# Altium PCB GBA_DMG.pcbdoc
Units mil, origin at the board's own origin, x right, y up, seen from the top; angles counter-clockwise.
Board outline 5005.59 x 4149.45 mil, 2 copper layers (Top Layer, Bottom Layer); 51 components, 69 nets, 162 pads, 18 vias.
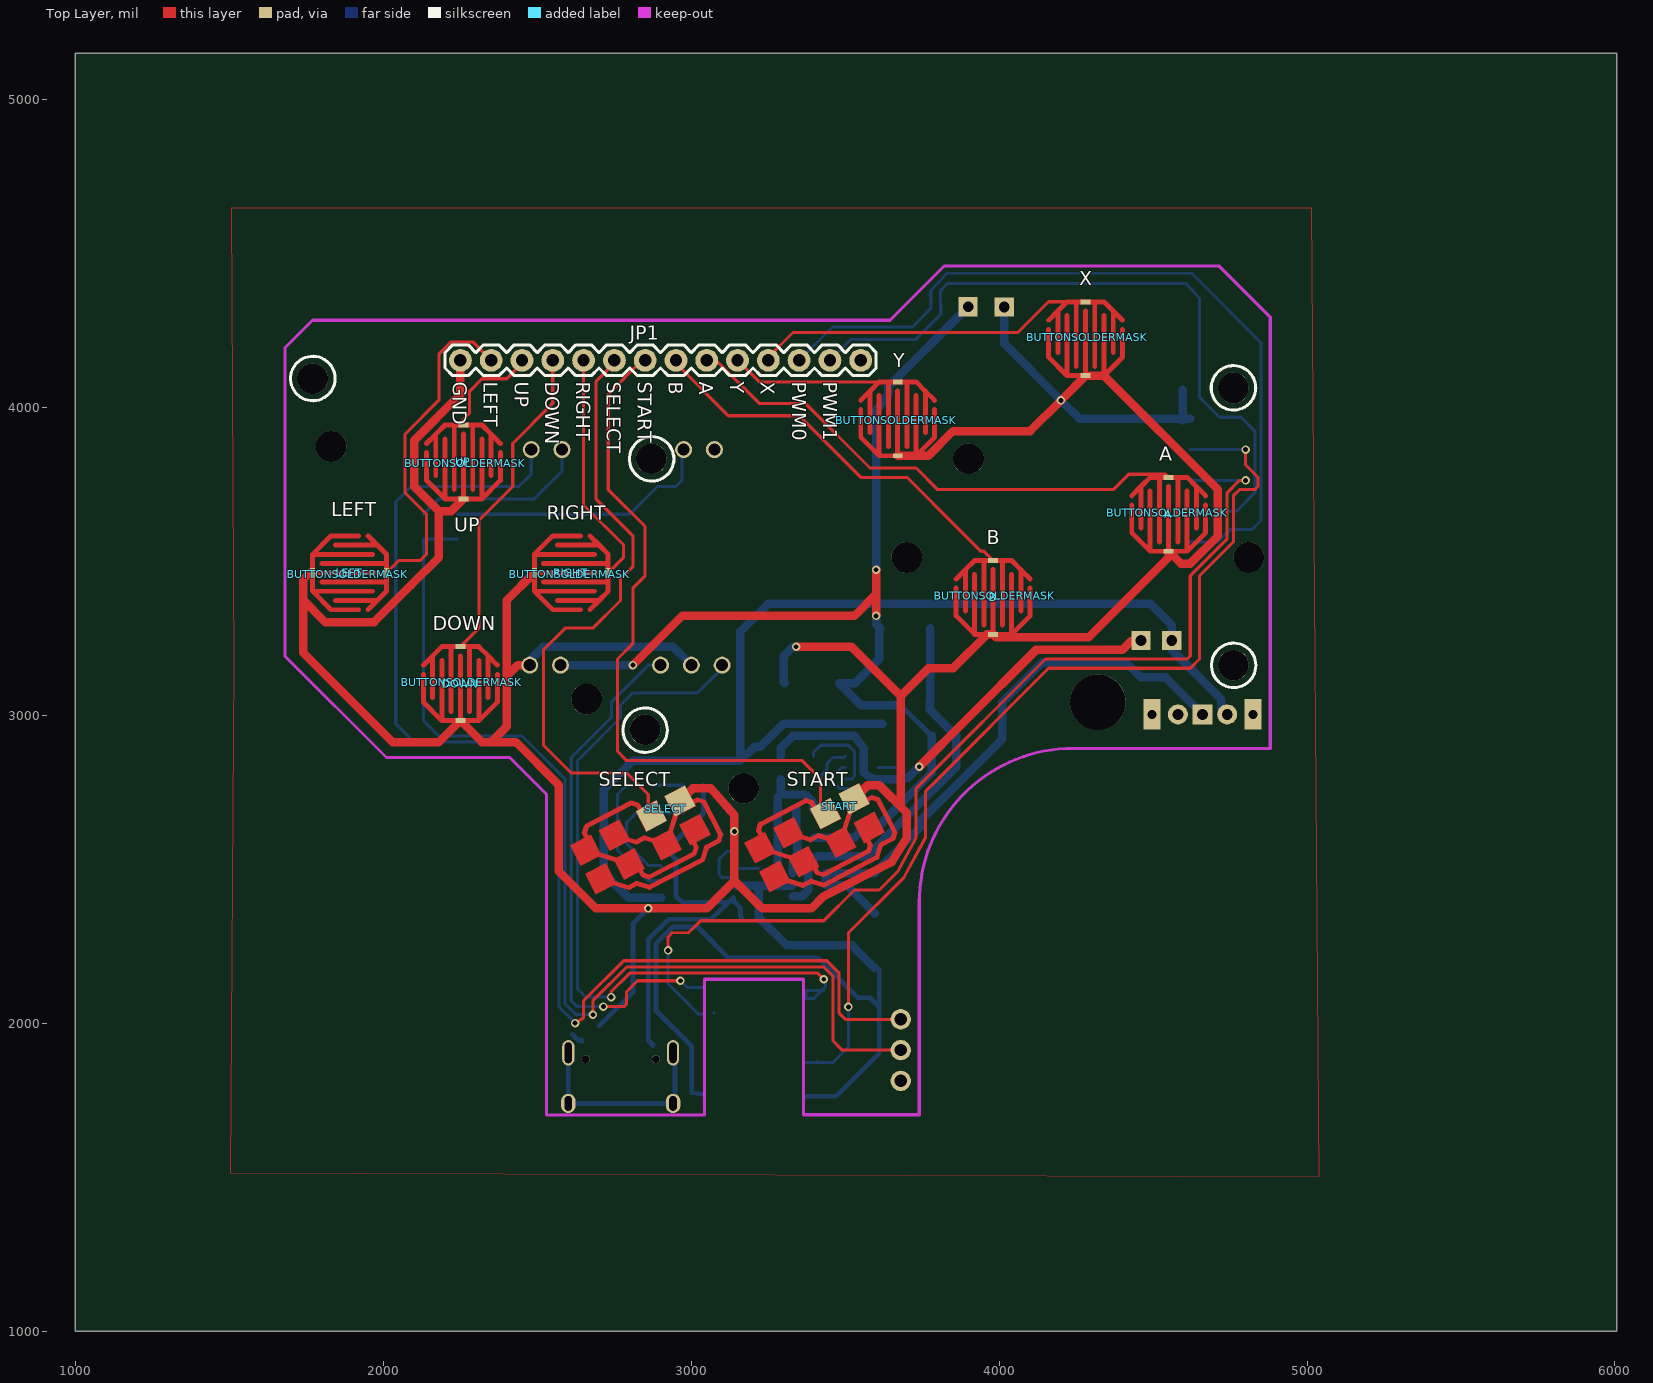
[diagram p0: Top Layer view]
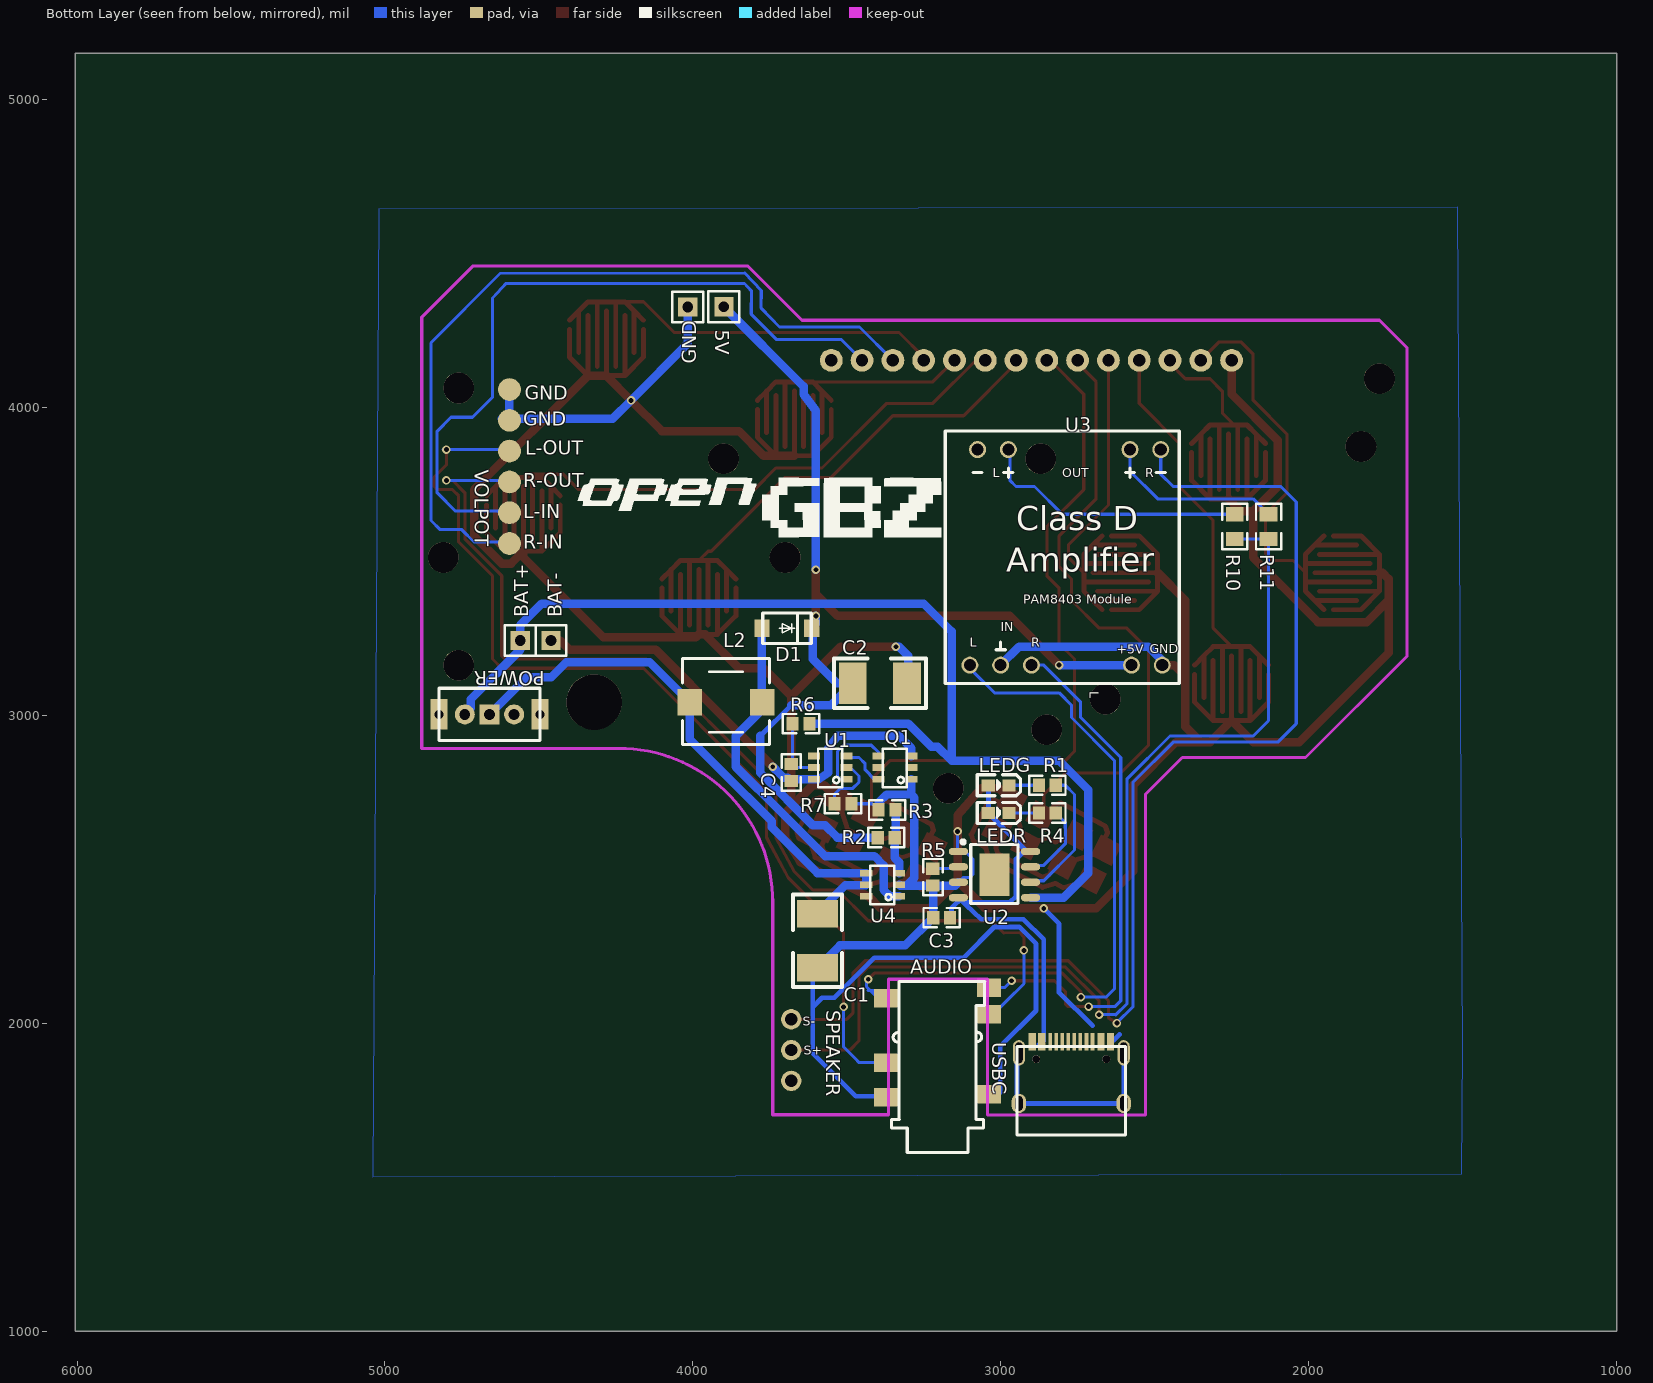
[diagram p1: Bottom Layer view, seen from below]

## Layer stack, top to bottom
Top Layer: signal copper (thickness not stored)
Dielectric: dielectric 12.6, FR-4, Dk 4.8
Bottom Layer: signal copper (thickness not stored)

## Board outline
6005.59,1000 1000,1000 1000,5149.45 6005.59,5149.45

## Components (designator, comment, footprint, x,y, rotation, side; value= is the part's Value field where it differs from the comment)
5V "5V" HDR-1X1/2.54 3899.61,4326.46 r0 bottom
A "DMG-BTN" DMG-BTN 4550.61,3532.46 r0 top
AUDIO "PJ-399E-6A" PJ-399E-6A 3205.61,1658.89 r90 bottom
B "DMG-BTN" DMG-BTN 3980.61,3262.46 r0 top
BAT+ "BAT+" HDR-1X1/2.54 4560.61,3242.46 r0 bottom
BAT- "BAT-" HDR-1X1/2.54 4460.61,3242.46 r0 bottom
BUTTONSOLDERMASK "_" ? 2255.59,3107.44 r0 top
BUTTONSOLDERMASK "_" ? 2605.59,3457.44 r0 top
BUTTONSOLDERMASK "_" ? 2265.59,3817.44 r0 top
BUTTONSOLDERMASK "_" ? 3985.59,3387.44 r0 top
BUTTONSOLDERMASK "_" ? 1885.59,3457.44 r0 top
BUTTONSOLDERMASK "_" ? 3665.59,3957.44 r0 top
BUTTONSOLDERMASK "_" ? 4285.59,4227.44 r0 top
BUTTONSOLDERMASK "_" ? 4545.59,3657.44 r0 top
C1 "22uF" 1812 3595.61,2267.46 r270 bottom
C2 "22uF" 1812 3392.46,3103.57 r0 bottom
C3 "10u" 0603 3160.61,2342.46 r180 bottom
C4 "0.1u" 0603 3680.61,2782.46 r270 bottom
D1 "SS34" SMA(DO-214AC) 3690.61,3282.46 r0 bottom
DOWN "DMG-BTN" DMG-BTN 2250.61,2982.46 r0 top
GND "GND" HDR-1X1/2.54 4016.61,4325.46 r0 bottom
JP1 "PINHD-1X14" 1X14 2250.61,4152.46 r0 top
L2 "22uH" 7*7*4 4010.61,3042.46 r0 bottom
LEDG "19-217/GHC-YR1S2/3T" LED-0603 3040.61,2772.46 r0 bottom
LEDR "Red(0603)" LED-0603 3040.61,2682.46 r0 bottom
LEFT "DMG-BTN" DMG-BTN 1770.61,3462.46 r270 top
POWER "Toggle Switch" SW5-2.0-8.8X4.4X4.7MM-90D 4660.61,3002.46 r270 bottom
Q1 "FS8205" SOT-23-6 3290.61,2792.46 r180 bottom
R1 "1k" 0603 2880.61,2772.46 r0 bottom
R2 "7.5k" 0603 3340.61,2602.46 r180 bottom
R3 "1k" 0603 3400.61,2692.46 r0 bottom
R4 "1k" 0603 2880.61,2682.46 r0 bottom
R5 "2k" 0603 3220.61,2442.46 r270 bottom
R6 "100" 0603 3680.61,2972.46 r0 bottom
R7 "2k" 0603 3480.61,2712.46 r180 bottom
R10 "16" 0805 2240.61,3652.46 r90 bottom
R11 "16" 0805 2130.61,3652.46 r90 bottom
RIGHT "DMG-BTN" DMG-BTN 2490.61,3462.46 r270 top
SELECT "DMG-BTN" DMG-SEL 2870.61,2672.46 r27.5 top
SPEAKER "PINHD-1X3" 1X03-CLEANBIG 3680.61,1912.46 r270 bottom
START "DMG-BTN" DMG-SEL 3436.21,2680.06 r27.5 top
U1 "FS312F-G" SOT-23-6 3500.61,2792.46 r180 bottom
U2 "TP4056" SOP-8_EP_150MIL 2920.61,2402.46 r0 bottom
U3 "PAM8403" AMPLIFIER-PAM8403 2800.61,3512.46 r0 bottom
U4 "MT3608" SOT-23-6 3330.61,2412.46 r180 bottom
UP "DMG-BTN" DMG-BTN 2260.61,3702.46 r0 top
USBC "TYPE-C-31-M-12" TYPE-C-31-M-12 2947.07,1636.78 r270 bottom
VOLPOT "PINHD-1X5" 1X06 4595.61,3557.46 r270 bottom
X "DMG-BTN" DMG-BTN 3670.61,3842.46 r0 top
Y "DMG-BTN" DMG-BTN 4280.61,4102.46 r0 top
? "" IMAGE 3783.83,3674.32 r0 top

## Footprints (in the part's own frame and the unit in brackets; to place one, negate y for a bottom-side part, rotate by r counter-clockwise, add the part's x,y. Pads: shape width x height; smd on the part's side, far side on the other; paste and mask are expansions set on the pad)
1X03-CLEANBIG [mil]
  round 66 hole 40: 1(100,0) 2(0,0) 3(-100,0)
1X06 [mil]
  round 74 smd: 1(0,0) 2(-100,0) 3(-200,0) 4(-300,0) 5(-400,0) 6(-500,0)
1X14 [mil]
  round 74 hole 40: 1(0,0) 2(100,0) 3(200,0) 4(300,0) 5(400,0) 6(500,0) 7(600,0) 8(700,0) 9(800,0) 10(900,0) 11(1000,0) 12(1100,0) 13(1200,0) 14(1300,0)
  silkscreen extent -50,-50 1350,50
7*7*4 [mil]
  rect 79x86.61 smd: 1(0,0) 2(-236,0)
  silkscreen extent -260,-142 24,138
0603 [mm]
  rect 1x1.1 smd: 1(-0.1,0) 2(-1.5,0)
  silkscreen extent -2.3,-0.8 0.7,0.8
0805 [mm]
  rect 1.16x1.47 smd: 1(0,0) 2(-2.032,0)
  silkscreen extent -2.89,-1.03 0.88,1.04
1812 [mil]
  rect 90x133.86 smd: 1(88,0) 2(-88,0)
  silkscreen extent -150,-80 150,80
AMPLIFIER-PAM8403 [mil]
  round 55.1 hole 39.4: +5V(-225,350) GND(-325,350) IN.COM(200,350) IN.L(300,350) IN.R(100,350) OUT.L+(175,-350) OUT.L-(275,-350) OUT.R+(-220,-350) OUT.R-(-320,-350)
  silkscreen extent -380,-410 380,410
DMG-BTN [mil]
  rect 32x16 smd: P$1(0,0) P$2(0,240)
  Top Layer lines w16: -120,150 -120,60 -60,0 ; -120,180 -90,210 ; -90,75 -90,210 ; -60,195 -60,0 ; -30,30 -30,240 ; 0,210 0,0 ; 30,30 30,240 ; 60,195 60,0 ; 90,75 90,210 ; 120,150 120,60 60,0 ; 120,180 90,210 ; -90,210 -60,240 -30,240 ; -60,0 0,0 ; -30,240 30,240 ; 0,0 60,0 ; 30,240 60,240 90,210
DMG-SEL [mil]
  rect 75x75 smd: P$1(0,0) P$2(105.02,0.01)
  Top Layer region: -277.5,-37.5 -202.5,-37.5 -202.5,37.5 -277.5,37.5
  Top Layer region: -277.5,-142.5 -202.5,-142.5 -202.5,-67.5 -277.5,-67.5
  Top Layer region: -172.5,-142.5 -97.5,-142.5 -97.5,-67.5 -172.5,-67.5
  Top Layer region: -172.5,-37.5 -97.5,-37.5 -97.5,37.5 -172.5,37.5
  Top Layer region: -37.5,-37.5 37.5,-37.5 37.5,37.5 -37.5,37.5
  Top Layer region: 67.5,-37.5 142.5,-37.5 142.5,37.5 67.5,37.5
  Top Layer region: 67.5,-142.5 142.5,-142.5 142.5,-67.5 67.5,-67.5
  Top Layer region: -37.5,-142.5 37.5,-142.5 37.5,-67.5 -37.5,-67.5
  Top Layer lines w16: -217.5,22.47 -217.55,52.48 -202.5,67.53 -37.45,67.52 -22.49,52.52 -22.44,22.51 ; -217.47,-22.53 -157.49,-82.5 ; -217.53,-127.46 -172.56,-172.52 -142.45,-172.51 -112.53,-202.52 82.53,-202.49 112.45,-172.51 157.53,-172.53 172.45,-157.53 172.48,-37.48 157.52,-22.47 127.51,-22.52 ; -112.5,-22.5 -82.48,-52.55 -52.47,-52.5 -22.55,-82.51 ; -112.47,-127.47 -112.56,-157.53 -97.46,-172.49 67.5,-172.45 82.5,-157.49 82.54,-127.52 ; 22.54,-82.53 82.51,-22.55
HDR-1X1/2.54 [mil]
  rect 62x62 hole 35: 1(0,0)
  silkscreen extent -50,-50 50,50
IMAGE [mil]
LED-0603 [mil]
  rect 43x39 smd: 1(0,0) 2(-67,0)
  silkscreen extent -105,-34 36,34
PJ-399E-6A [mil]
  rect 60x78.74 smd: 1(110.2,-167.3) 2(100.4,167.35) 3(212.6,167.35) 4(370.1,-167.3) 5(456.7,-167.3) 6(421.3,167.35)
  silkscreen extent -79,-154 476,150
SMA(DO-214AC) [mil]
  rect 50x57.9 smd: 1(85,0.05) 2(-77,0.05)
  silkscreen extent -75,-49 82,49
SOP-8_EP_150MIL [mil]
  oval 62.99x23.62 smd: 1(217,-155) 2(217,-105) 3(217,-55) 4(217,-5) 5(-17,-5) 6(-17,-55) 7(-17,-105) 8(-17,-155)
  rect 98.42x137.79 smd: 9(100,-80)
  silkscreen extent 24,-192 208,14
SOT-23-6 [mm]
  rect 1x0.55 smd: 1(0,0) 2(0,0.95) 3(0,1.9) 4(-2.7,1.9) 5(-2.7,0.95) 6(-2.7,0)
  silkscreen extent -2.36,-0.69 -0.38,2.51
SW5-2.0-8.8X4.4X4.7MM-90D [mil]
  round 65 hole 35: A(0,-80) B(0,80)
  rect 65x65 hole 35: COM(0,0)
  rect 99x55 hole 30: NC1(0,-164) NC2(0,164)
  silkscreen extent -85,-164 85,164
TYPE-C-31-M-12 [mm]
  rect 1.45x0.6 smd: A1(-7.695,1.245) A4(-7.695,2.02) B1(-7.695,7.695) B4(-7.695,6.92)
  rect 1.45x0.3 smd: A5(-7.695,3.22) A6(-7.695,4.22) A7(-7.695,4.72) A8(-7.695,5.72) B5(-7.695,6.22) B6(-7.695,5.22) B7(-7.695,3.72) B8(-7.695,2.72)
  rect 0.1x0.1 smd: A9(-8.2,6.9) A12(-8.1,1.3) B9(-8.2,2) B12(-8.2,7.7)
  oval 2.1x1 hole 0.6 slot 1.7 at 0 deg: S1(-6.78,0.15) S1(-6.78,8.79)
  oval 1.6x1.2 hole 0.6 slot 1.199 at 0 deg: S1(-2.6,0.15) S1(-2.6,8.79)
  round 0.65 hole 0.65 unplated: ""(-6.25,1.58) ""(-6.25,7.36)
  silkscreen extent -7.3,0 0,8.94
? [mil]

## Free pads (board coordinates)
  round 100 hole 100 unplated: ""(1770.61,4092.46) ""(1830.61,3872.46) ""(2660.61,3052.46) ""(2850.61,2952.46) ""(2870.61,3832.46) ""(3170.61,2762.46) ""(3700.61,3512.46) ""(3900.61,3832.46) ""(4760.6,3162.46) ""(4760.6,4062.46) ""(4810.6,3512.46)
  round 180 hole 180 unplated: ""(4320.6,3042.46)

## Via types
v1: diameter 27.56, hole 15.75, Top Layer to Bottom Layer, 18 vias

## Nets (pads, with @x,y where several pads share a name; then routed paths per layer and width w, separated by ;. In a path a pad name is that pad's centre, name@x,y a point inside that pad or via, vN(x,y) a via of type N, cw(c..) or ccw(c..) an arc to the next point about the centre after c; other vN are vias at no path point)
$BoardOutlineNet: 
A_P$2: A.P$2 JP1.9 | length 1698.8
  Top Layer w10: JP1.9 3080.61,4152.46 3220.61,4012.46 3370.61,4012.46 3580.61,3802.46 3730.61,3802.46 3800.61,3732.46 4370.61,3732.46 4420.61,3782.46 4540.61,3782.46 A.P$2
AUDIO1_3:  | length 3.7
  Bottom Layer w10: 3407.91,1875.06 3410.51,1872.46
AUDIO1_4:  | length 0.1
  Bottom Layer w10: 3073.21,2032.46 3073.31,2032.56
AUDIO_3: AUDIO.3 VOLPOT.4 | length 3161.5
  Top Layer w10: v1(3510.61,2052.46) 3510.61,2072.46 3510.61,2292.46 3690.61,2472.46 3760.61,2602.46 3760.61,2752.46 3790.61,2782.46 4160.61,3152.46 4290.61,3152.46 4620.61,3152.46 4650.61,3182.46 4650.61,3452.46 4720.61,3522.46 4760.61,3562.46 4760.61,3712.46 4780.61,3732.46 4830.61,3732.46 4840.61,3742.46 4840.61,3772.46 4800.61,3812.46 v1(4800.61,3862.46)
  Bottom Layer w10: AUDIO.3 3459.64,1871.49 3473.21,1885.06 ; 3460.61,1872.46 3510.61,1922.46 v1(3510.61,2052.46) ; VOLPOT.4@4620.61,3862.46 v1(4800.61,3862.46) v1@4810.61,3862.46
AUDIO_4: AUDIO.4 VOLPOT.3 | length 3330.3
  Top Layer w10: v1@2925.01,2235.96 2925.01,2279.76 2938.34,2293.94 2990.61,2292.46 3030.61,2332.46 3430.61,2332.46 3530.61,2432.46 3610.61,2432.46 3670.61,2492.46 3730.61,2602.46 3730.61,2762.46 3750.61,2782.46 4150.61,3182.46 4340.61,3182.46 4610.61,3182.46 4620.61,3192.46 4620.61,3452.46 4740.61,3572.46 4740.61,3722.46 4780.61,3762.46 v1(4800.61,3762.46)
  Bottom Layer w10: v1@2925.03,2235.95 2925.03,2128.04 2980.61,2072.46 3020.61,2032.46 3024.08,2028.99 AUDIO.4 ; VOLPOT.3@4620.61,3762.46 v1(4800.61,3762.46)
  other v1: 2925.03,2235.95
AUDIO_5: AUDIO.5 U3.IN.R | length 1736.5
  Top Layer w10: v1(2715.08,2053.51) 2781.66,2053.51 2790.61,2062.46 2790.61,2102.46 2825.8,2137.65 v1(2965.25,2137.65)
  Bottom Layer w10: v1(2715.08,2053.51) 2639.66,2053.51 2629.61,2053.46 2610.61,2072.46 2610.61,2862.46 2740.61,2992.46 2740.61,3042.46 2860.61,3162.46 U3.IN.R ; v1(2965.25,2137.65) 2987.31,2115.59 AUDIO.5
AUDIO_6: AUDIO.6 U3.IN.L | length 2424.5
  Top Layer w10: v1(2739.82,2084.83) 2739.82,2101.67 2800.61,2162.46 3410.61,2162.46 v1(3430.61,2142.46)
  Bottom Layer w10: 2634.51,2856.36 2630.61,2852.46 ; v1(2739.82,2084.83) 2657.24,2084.83 2630.61,2111.46 2630.61,2852.46 ; U3.IN.L 3100.61,3152.46 3020.61,3072.46 2810.61,3072.46 2770.61,3032.46 2770.61,2992.46 2630.61,2852.46 ; 3430.61,2106.36 3372.96,2106.36 AUDIO.6 3398.34,2080.19 3435.61,2117.46 3435.61,2137.46 v1(3430.61,2142.46)
B_P$2: B.P$2 JP1.8 | length 1305.1
  Top Layer w10: JP1.8 2950.61,4142.46 3120.61,3972.46 3350.61,3972.46 3550.61,3772.46 3700.61,3772.46 3870.61,3602.46 3940.61,3532.46 3950.61,3532.46 B.P$2
C2_1: 5V.1 C2.1 D1.2 R2.2 U3.+5V | length 3513.4
  Top Layer w27.56: v1(2810.61,3162.46) 2830.61,3182.46 2970.61,3322.46 3494.01,3322.46 3530.11,3322.46 3600.61,3392.96 ; v1(3600.61,3322.46) v1(3600.61,3472.46)
  Bottom Layer w15.75: 3680.61,3032.46 3780.61,2932.46
  Bottom Layer w27.56: U3.+5V v1(2810.61,3162.46) ; R2.2 3483.61,2602.46 3530.61,2602.46 3570.61,2642.46 3610.61,2642.46 3780.61,2812.46 3780.61,2837.96 3780.61,2842.46 3780.61,2862.46 3780.61,2932.46 ; v1(3600.61,3322.46) 3600.61,3295.36 D1.2 ; v1(3600.61,3472.46) 3600.61,3988.46 3640.61,4042.46 3640.61,4067.46 5V.1 ; D1.2@3613.61,3282.46 3610.61,3279.46 3610.61,3182.46 3531.72,3103.57 C2.1 3551.57,3032.46 3650.61,3032.46 3680.61,3032.46
CN1_A1: USBC.A1
CN1_A5: USBC.A5
CN1_A6: USBC.A6
CN1_A7: USBC.A7
CN1_A8: USBC.A8
CN1_A9: USBC.A9
CN1_A12: USBC.A12
CN1_B4: USBC.B4
CN1_B5: USBC.B5
CN1_B6: USBC.B6
CN1_B7: USBC.B7
CN1_B8: USBC.B8
CN1_B9: USBC.B9
CN1_B12: USBC.B12
CN1_S1: USBC.S1 | length 682.7
  Bottom Layer w15.75: USBC.S1@2601.01,1739.14 2945.95,1739.14 2947.05,1738.03 2947.05,1897.82 USBC.S1@2941.16,1903.71 ; USBC.S1@2601.01,1903.71 2601.01,1743.93 USBC.S1@2606.91,1738.03
DOWN_P$2: DOWN.P$2 JP1.4 | length 1054.3
  Top Layer w10: DOWN.P$2 2310.61,3282.46 2310.61,3632.46 2420.61,3742.46 2420.61,3882.46 2550.61,4012.46 JP1.4
GND: A.P$1 AUDIO.1 AUDIO.2 B.P$1 C1.1 C2.2 C3.2 DOWN.P$1 GND.1 JP1.1 LEFT.P$1 Q1.1 R3.1 R5.1 R7.1 RIGHT.P$1 SELECT.P$2 START.P$2 U2.1 U2.3 U3.GND U3.IN.COM U4.2 UP.P$1 USBC.B1 VOLPOT.5 VOLPOT.6 X.P$1 Y.P$1 | length 15039.5
  Top Layer w27.56: 1740.61,3373.06 1811.21,3302.46 1970.61,3302.46 2090.61,3422.46 2180.61,3512.46 2180.61,3612.46 2180.61,3662.46 ; LEFT.P$1 1760.61,3462.46 1740.61,3442.46 1740.61,3202.46 2030.61,2912.46 2180.61,2912.46 DOWN.P$1 2320.61,2912.46 2350.61,2912.46 ; JP1.1 2250.61,4042.46 2100.61,3892.46 2100.61,3742.46 2180.61,3662.46 ; UP.P$1 2220.61,3662.46 2180.61,3662.46 ; 2400.61,3126.26 2436.81,3162.46 U3.GND ; RIGHT.P$1 2400.61,3372.46 2400.61,2962.46 2350.61,2912.46 ; SELECT.P$2 3005.31,2762.46 3010.61,2762.46 3030.61,2762.46 3063.61,2762.46 3140.51,2675.46 v1(3140.61,2622.46) 3140.61,2462.46 ; 3136.61,2458.46 3140.61,2462.46 ; v1(3340.61,3222.46) 3520.61,3222.46 3680.61,3062.46 ; START.P$2@3529.41,2728.66 3573.21,2772.46 3610.61,2772.46 3700.61,2682.46 3700.61,2602.46 3650.61,2522.46 3430.61,2412.46 3390.61,2372.46 3230.61,2372.46 3140.61,2462.46 ; X.P$1 3770.61,3842.46 3850.61,3922.46 4100.61,3922.46 v1(4200.61,4022.46) Y.P$1 4340.61,4102.46 4710.61,3732.46 4710.61,3582.46 4620.61,3492.46 4590.61,3492.46 A.P$1 4550.61,3512.46 4390.61,3352.46 4290.61,3252.46 3990.61,3252.46 B.P$1 3960.61,3262.46 3850.61,3152.46 3770.61,3152.46 3680.61,3062.46 ; 3680.61,2702.46 3680.61,3062.46 ; 2350.61,2912.46 2430.61,2912.46 2570.61,2772.46 2570.61,2492.46 2690.61,2372.46 v1(2860.61,2372.46) 3050.61,2372.46 3140.61,2462.46
  Bottom Layer w10: U2.3 3122.61,2472.46 3100.61,2472.46 3090.61,2482.46 3090.61,2532.46 3115.61,2557.46 U2.1 3140.61,2560.46 v1(3140.61,2622.46) ; R3.1 3416.71,2712.46 R7.1@3484.51,2712.46
  Bottom Layer w15.75: 2615.21,1963.16 2614.21,1963.26 2632.71,1944.76 2644.11,1944.76 USBC.B1@2644.11,1939.76 ; 2702.11,1991.46 2810.61,2098.56 2810.61,2142.46 2810.61,2232.46 2810.61,2312.46 2810.61,2322.46 v1(2860.61,2372.46) ; AUDIO.1 3002.01,1773.76 3002.01,1924.56 2885.61,2040.96 2885.61,2257.46 2940.61,2312.46 3020.61,2312.46 3120.61,2212.46 3410.61,2212.46 3540.61,2082.46 3580.61,2082.46 3610.61,2051.86 ; AUDIO.2 3376.13,1762.46 3470.61,1762.46 3610.61,1902.46 C1.1@3610.61,2174.46
  Bottom Layer w27.56: U3.GND 2475.61,3177.46 2520.61,3222.46 2940.61,3222.46 U3.IN.COM ; U2.3 3148.71,2446.36 R5.1 ; Q1.1 3290.61,2752.46 3300.61,2742.46 ; C2.2 3300.61,3107.42 3300.61,3192.46 3330.61,3222.46 v1(3340.61,3222.46) ; 3306.31,2446.36 3280.61,2472.16 3280.61,2732.46 3290.61,2742.46 3370.61,2742.46 3396.71,2716.36 R3.1 ; U4.2 3327.21,2446.36 R5.1 ; C1.1 3522.61,2252.46 3420.61,2252.46 3310.61,2252.46 C3.2 3219.71,2445.46 R5.1 ; GND.1 4016.61,4206.46 v1(4200.61,4022.46) 4260.61,3962.46 VOLPOT.5@4620.61,3962.46 ; VOLPOT.5 VOLPOT.6
JP1_12: JP1.12 VOLPOT.1 | length 2581.9
  Bottom Layer w10: JP1.12 3458.81,4260.66 3718.71,4260.46 3778.31,4321.76 3778.11,4379.26 3831.51,4435.66 4626.11,4434.46 4850.61,4209.06 4850.61,3632.46 4820.61,3602.46 4750.61,3602.46 4710.61,3562.46 VOLPOT.1@4620.61,3562.46
JP1_13: JP1.13 VOLPOT.2 | length 2391.7
  Bottom Layer w9.65: VOLPOT.2 4628.11,3657.46 4633.11,3662.46
  Bottom Layer w10: JP1.13 3517.51,4219.36 3727.61,4219.46 3810.61,4302.46 3810.35,4378.46 3832.51,4401.96 4606.61,4402.46 4650.61,4354.96 4650.61,4032.46 4715.61,3967.46 4785.61,3967.46 4830.61,3922.46 4830.61,3722.46 4770.61,3662.46 VOLPOT.2@4620.61,3662.46
JP1_14: JP1.14
LEDR_2: LEDR.2 R4.1 | length 96.9
  Bottom Layer w10: R4.1 LEDR.2
LEFT_P$2: JP1.2 LEFT.P$2 | length 1090.8
  Top Layer w10: LEFT.P$2 2050.61,3502.46 2120.61,3502.46 2140.61,3522.46 2140.61,3652.46 2070.61,3722.46 2070.61,3912.46 2180.61,4022.46 2180.61,4172.46 2220.61,4212.46 2290.61,4212.46 JP1.2
POWER_A: BAT+.1 POWER.A R6.2 U2.5 | length 3737.1
  Bottom Layer w27.56: U2.5 2795.61,2407.46 2715.61,2487.46 2715.61,2757.46 2810.61,2852.46 3160.11,2852.46 ; R6.2@3621.51,2972.46 3300.61,2972.46 3225.61,2897.46 3205.11,2897.46 3160.11,2852.46 ; POWER.A 4720.61,3022.46 4720.61,3052.46 4560.61,3212.46 BAT+.1 4560.61,3272.46 4560.61,3292.46 4490.61,3362.46 3250.61,3362.46 3160.11,3271.96 3160.11,2852.46
POWER_B: POWER.B
POWER_COM: C1.2 L2.1 POWER.COM U4.4 U4.5 | length 1896.3
  Bottom Layer w27.56: C1.2 3595.61,2357.46 3505.61,2447.46 3439.31,2447.46 U4.5 U4.4 3595.41,2487.26 3743.51,2635.36 3743.51,2655.36 3910.61,2822.46 4010.61,2922.46 L2.1 4140.61,3172.46 4180.61,3172.46 4410.61,3172.46 4460.61,3122.46 4540.61,3122.46 POWER.COM
POWER_NC1: POWER.NC1
POWER_NC2: POWER.NC2
Q1_2: Q1.2
Q1_5: Q1.5
R1_1: LEDG.2 R1.1 | length 96.9
  Bottom Layer w10: R1.1 LEDG.2
R2_1: R2.1 R3.2 U4.3 | length 227.4
  Bottom Layer w10: U4.3 3330.61,2502.46
  Bottom Layer w27.56: U4.3 3330.61,2522.46 3344.51,2536.36 3344.51,2602.46 3341.51,2605.46 R3.2@3341.51,2692.46
RIGHT_P$2: JP1.5 RIGHT.P$2 | length 764.6
  Top Layer w10: JP1.5 2650.61,3682.46 2780.61,3552.46 2780.61,3512.46 RIGHT.P$2
S$7: 
S$11: 
S$67: 
S$69: 
SELECT_P$1: JP1.6 SELECT.P$1 | length 1977.8
  Top Layer w10: JP1.6 2750.61,4142.46 2690.61,4082.46 2690.61,3702.46 2810.61,3582.46 2810.61,3482.46 2770.61,3442.46 2770.61,3372.46 2680.61,3282.46 2590.61,3282.46 2520.61,3212.46 2520.61,2902.46 2610.61,2812.46 2790.61,2812.46 2860.61,2742.46 2860.61,2682.46 SELECT.P$1
SPEAKER_1: SPEAKER.1
SPEAKER_2: R10.2 R11.2 SPEAKER.2 | length 3399.9
  Top Layer w10: v1(2680.8,2027.46) 2680.8,2072.65 2790.61,2182.46 3430.61,2182.46 3460.61,2152.46 3460.61,1942.46 3490.61,1912.46 SPEAKER.2
  Bottom Layer w10: R10.2 R11.2 2130.61,2982.46 2180.61,2932.46 2420.61,2932.46 2450.61,2932.46 2590.61,2792.46 2590.61,2742.46 2590.61,2062.46 2626.61,2027.46 2626.81,2026.26 2628.11,2027.46 v1(2680.8,2027.46)
SPEAKER_3: SPEAKER.3 U3.OUT.R- | length 4017.7
  Top Layer w10: v1(2622.82,2000.13) 2650.81,2016.96 ; 2650.61,2016.86 2650.61,2072.46 2780.61,2202.46 3440.61,2202.46 3480.61,2162.46 3480.61,2032.46 3500.61,2012.46 SPEAKER.3
  Bottom Layer w10: U3.OUT.R- 2480.61,3782.46 2440.61,3742.46 2090.61,3742.46 2040.61,3692.46 2040.61,2972.46 2100.61,2912.46 2440.61,2912.46 2570.61,2782.46 2570.61,2053.16 v1@2623.2,2001.46 ; v1(2622.82,2000.13) 2623.76,2000.13 v1@2623.76,2000.9
START_P$1: JP1.7 START.P$1 | length 2228.6
  Top Layer w10: JP1.7 2840.61,4152.46 2730.61,4042.46 2730.61,3732.46 2850.61,3612.46 2850.61,3452.46 2810.61,3412.46 2810.61,3352.46 2810.61,3232.46 2760.61,3182.46 2760.61,2972.46 2760.61,2882.46 2790.61,2852.46 3360.61,2852.46 3420.61,2792.46 3420.61,2695.76 START.P$1@3436.21,2680.16
U1_1: Q1.4 U1.1 | length 291.6
  Bottom Layer w10: Q1.4 3396.91,2878.76 3420.61,2902.46 3510.61,2902.46 3530.61,2882.46 3530.61,2802.46 ; U1.1 3520.61,2792.46 ; 3520.61,2792.46 3530.61,2802.46 ; 3520.61,2792.46 3530.61,2802.46
U1_2: R7.2 U1.2 | length 198.3
  Bottom Layer w10: U1.2 3488.01,2829.86 3460.61,2802.46 3460.61,2782.46 3480.61,2762.46 3520.61,2762.46 3540.61,2742.46 3540.61,2713.36 R7.2
U1_3: Q1.6 U1.3 | length 146.4
  Bottom Layer w10: Q1.6 3410.61,2792.46 3440.61,2822.46 3440.61,2842.46 3460.61,2862.46 3495.81,2862.46 U1.3
U1_4: U1.4
U1_5: C4.2 R6.1 U1.5 | length 211.1
  Bottom Layer w10: U1.5 3668.91,2829.86 3680.61,2841.56 3676.71,2845.46 R6.1
U1_6: BAT-.1 C4.1 Q1.3 U1.6 | length 1519.3
  Top Layer w10: BAT-.1 BAT-.1@4470.61,3242.46
  Top Layer w27.56: v1(3740.61,2832.46) 3890.61,2982.46 4120.61,3212.46 4400.61,3212.46 4430.61,3242.46 BAT-.1
  Bottom Layer w27.56: Q1.3 3290.61,2892.46 3330.61,2932.46 3530.61,2932.46 3560.61,2892.46 3560.61,2812.46 3590.61,2792.46 U1.6 3674.51,2792.46 C4.1 3691.71,2797.46 3705.61,2797.46 3715.61,2807.46 v1(3740.61,2832.46)
U2_2: R5.2 U2.2 | length 85.4
  Bottom Layer w10: U2.2 3143.51,2501.56 R5.2@3220.61,2501.56
U2_6: R1.2 U2.6 | length 439.9
  Bottom Layer w10: R1.2 2790.61,2772.46 2760.61,2742.46 2760.61,2652.46 2760.61,2582.46 2760.61,2562.46 2860.61,2462.46 2898.61,2462.46 U2.6
U2_7: R4.2 U2.7 | length 256.7
  Bottom Layer w10: R4.2 2790.87,2651.46 2790.61,2612.46 2790.61,2582.46 2860.61,2512.46 2898.61,2512.46 U2.7
U3_OUT.L+: R10.1 U3.OUT.L+ | length 877.6
  Bottom Layer w10: R10.1 2800.61,3652.46 2890.61,3742.46 2950.61,3742.46 2970.61,3762.46 2970.61,3857.46 U3.OUT.L+
U3_OUT.L-: U3.OUT.L-
U3_OUT.R+: R11.1 U3.OUT.R+ | length 578
  Bottom Layer w10: R11.1 2180.61,3702.46 2490.61,3702.46 2580.61,3792.46 U3.OUT.R+
U4_1: D1.1 L2.2 U4.1 | length 1236.9
  Bottom Layer w27.56: U4.1 3360.61,2412.46 3380.61,2432.46 3380.61,2512.46 3410.61,2542.46 3570.61,2542.46 3710.61,2682.46 3860.61,2832.46 3860.61,2932.46 3774.61,3018.46 L2.2 3775.61,3043.46 D1.1@3775.61,3282.46
U4_6: U4.6
UP_P$2: JP1.3 UP.P$2 | length 359.6
  Top Layer w10: 2241.81,3942.46 2280.61,3981.26 2280.61,4052.46 2320.61,4092.46 2400.61,4092.46 2450.61,4142.46 JP1.3 ; 2244.41,3942.46 UP.P$2
VBUS: C3.1 LEDG.1 LEDR.1 U2.4 U2.8 USBC.A4 | length 1431.9
  Bottom Layer w15.75: USBC.A4 2875.61,1931.66 2875.61,1927.46 2860.61,1942.46 2860.61,1982.46 2860.61,2272.46 2926.61,2337.53 3062.83,2337.46 U2.4 ; LEDG.1 LEDR.1 2915.61,2557.46 U2.8 2925.61,2557.46 2950.61,2532.46 2950.61,2412.46 2970.61,2392.46 3122.61,2392.46 U2.4 ; C3.1@3164.51,2342.46 3160.61,2346.36 3160.61,2372.46 3137.61,2395.46 U2.4
X_P$2: JP1.10 X.P$2 | length 549
  Top Layer w10: JP1.10 3220.61,4082.46 X.P$2
Y_P$2: JP1.11 Y.P$2 | length 1114.6
  Top Layer w10: JP1.11 3250.61,4162.46 3330.61,4242.46 4060.61,4242.46 4160.61,4342.46 Y.P$2
pads on no net: U2.9 USBC.

## Polygon pours and split planes (outlines as drawn)
GND on Bottom Layer (solid): 1515.7,4649.45 5020.64,4643 5039.68,1501.77 1503.97,1510.73 1500,1917.87
GND on Top Layer (solid): 1508.27,4648.46 5013.07,4647.11 5037.63,1500 1504.37,1512.67 1516.96,3162.67

## Keep-outs
Keep-Out Layer:
  lines w10 net $BoardOutlineNet: 3740.61,2392.46 cw(c4240.61,2392.46) 4240.6,2892.46

## Silkscreen, mask and mechanical layers (free items; w line width, h text height)
Top Overlay:
  circle w10: c4761.05,4062.86 r72.22
  circle w10: c4761.58,3161.76 r72.22
  circle w10: c1771.35,4093.34 r72.22
  circle w10: c2850.45,2951.55 r72.22
  circle w10: c2871.82,3832.18 r72.22
  text "GND" at 2226.51,4082.46 h45 r270
  text "LEFT" at 2326.51,4082.46 h45 r270
  text "UP" at 2426.51,4082.46 h45 r270
  text "DOWN" at 2526.51,4082.46 h45 r270
  text "RIGHT" at 2626.51,4082.46 h45 r270
  text "SELECT" at 2726.51,4082.46 h45 r270
  text "START" at 2826.51,4082.46 h45 r270
  text "B" at 2926.51,4082.46 h45 r270
  text "A" at 3026.51,4082.46 h45 r270
  text "Y" at 3126.51,4082.46 h45 r270
  text "X" at 3226.51,4082.46 h45 r270
  text "PWM0" at 3328.11,4082.46 h45 r270
  text "PWM1" at 3428.11,4082.46 h45 r270
  text "A" at 4520.61,3825.46 h45
  text "LEFT" at 1830.61,3645.46 h45
  text "RIGHT" at 2530.61,3635.46 h45
  text "UP" at 2230.61,3595.46 h45
  text "B" at 3960.61,3555.46 h45
  text "DOWN" at 2160.61,3275.46 h45
  text "SELECT" at 2700.61,2769.96 h45
  text "START" at 3310.61,2769.96 h45
Bottom Overlay:
  text "GND" at 4545.61,4024.96 h45
  text "GND" at 4550.61,3939.96 h45
  text "L-OUT" at 4545.16,3845.41 h45
  text "R-OUT" at 4550.66,3739.91 h45
  text "L-IN" at 4550.66,3639.91 h45
  text "Class D" at 2949.32,3600.14 h78.74
  text "R-IN" at 4550.66,3539.91 h45
  text "Amplifier" at 2983.07,3466.56 h78.74
  text "PAM8403 Module" at 2927.34,3361.1 h30
  text "L" at 2710.61,3077.46 h30 r90
  text "S-" at 3643.25,1991.1 h30
  text "S+" at 3640.65,1897.5 h30
Top Solder:
  region: 2590.61,2582.46 2690.61,2402.46 3080.61,2612.46 2980.61,2782.46
  region: 3150.61,2592.46 3250.61,2412.46 3640.61,2622.46 3540.61,2792.46

## Text inside footprints (layer, text, board x,y; h text height)
U3: Bottom Overlay "IN" at 3000.61,3272.46 h30; Bottom Overlay "OUT" at 2800.61,3772.46 h30; Bottom Overlay "L" at 3100.61,3222.46 h30; Bottom Overlay "R" at 2900.61,3222.46 h30; Bottom Overlay "L" at 3025.61,3772.46 h30; Bottom Overlay "R" at 2530.61,3772.46 h30; Bottom Overlay "+5V" at 2623.11,3199.46 h30; Bottom Overlay "GND" at 2516.11,3201.46 h30